# Altium PCB PCB_pami_superstar.PcbDoc
Units mm, origin at the board's own origin, x right, y up, seen from the top; angles counter-clockwise.
Board outline 83 x 54.25 mm, 2 copper layers (Top Layer, Bottom Layer); 28 components, 29 nets, 101 pads, 1 vias.
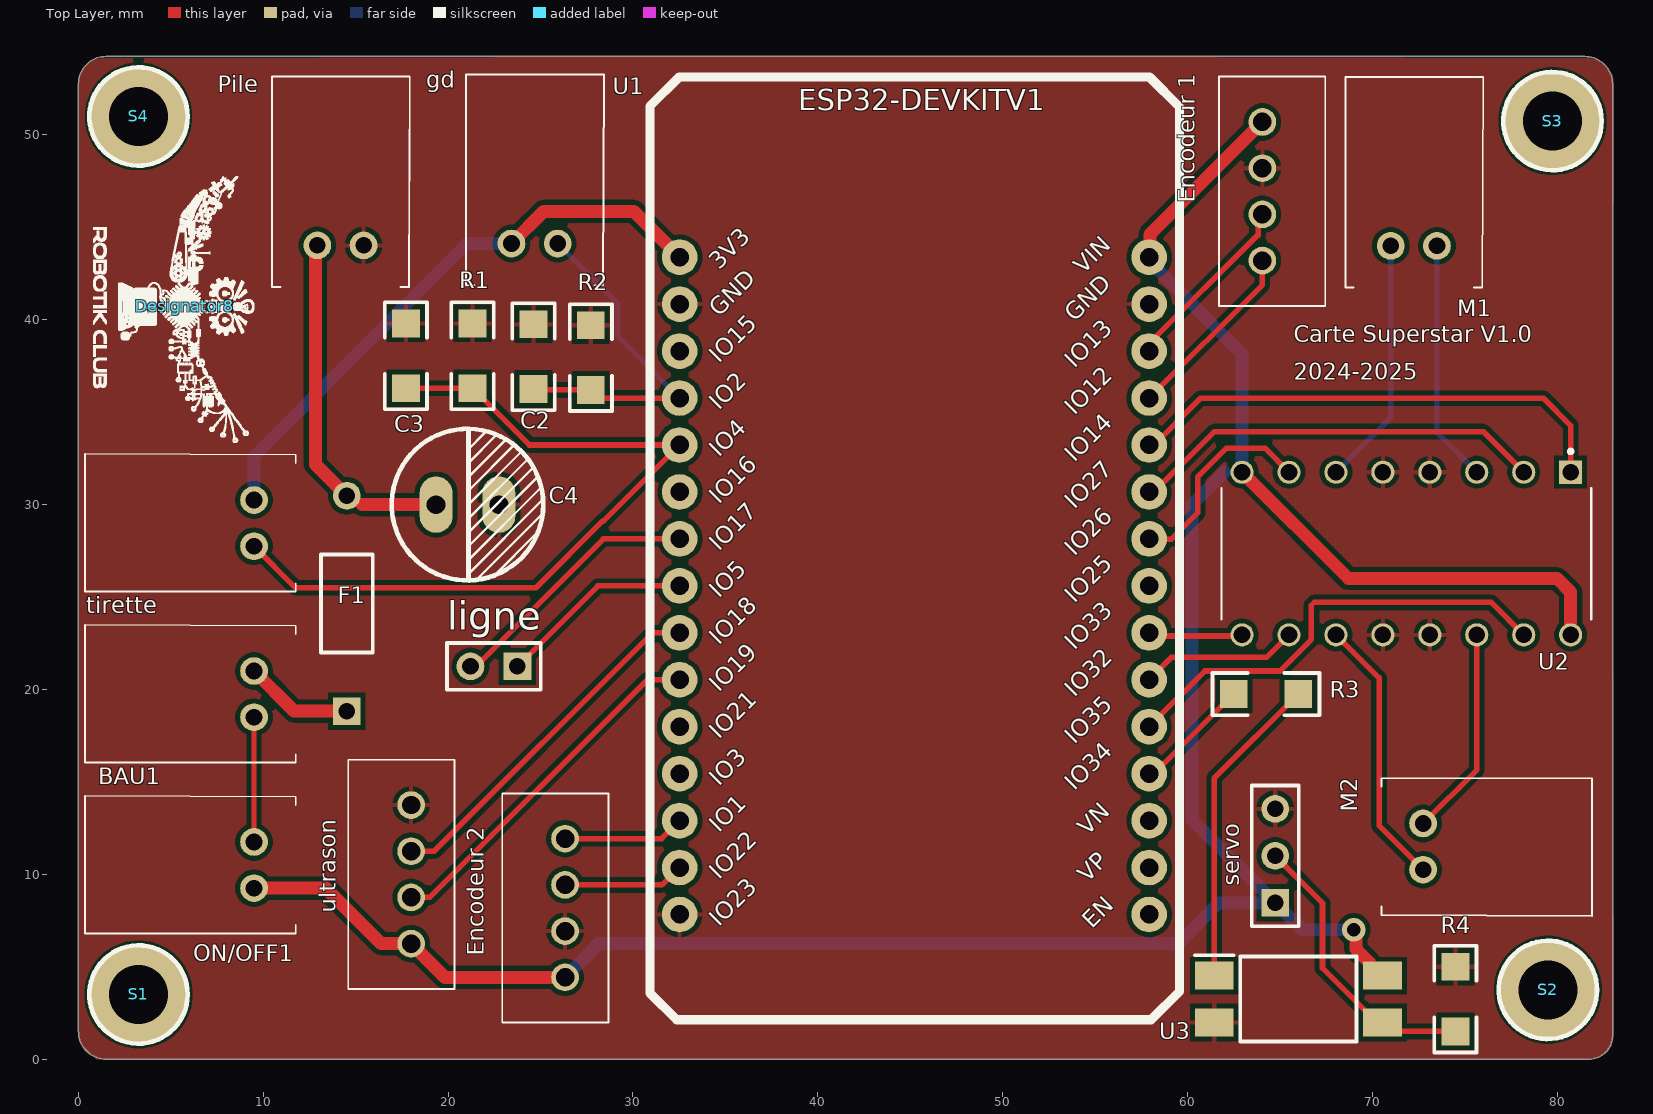
[diagram p0: Top Layer view]
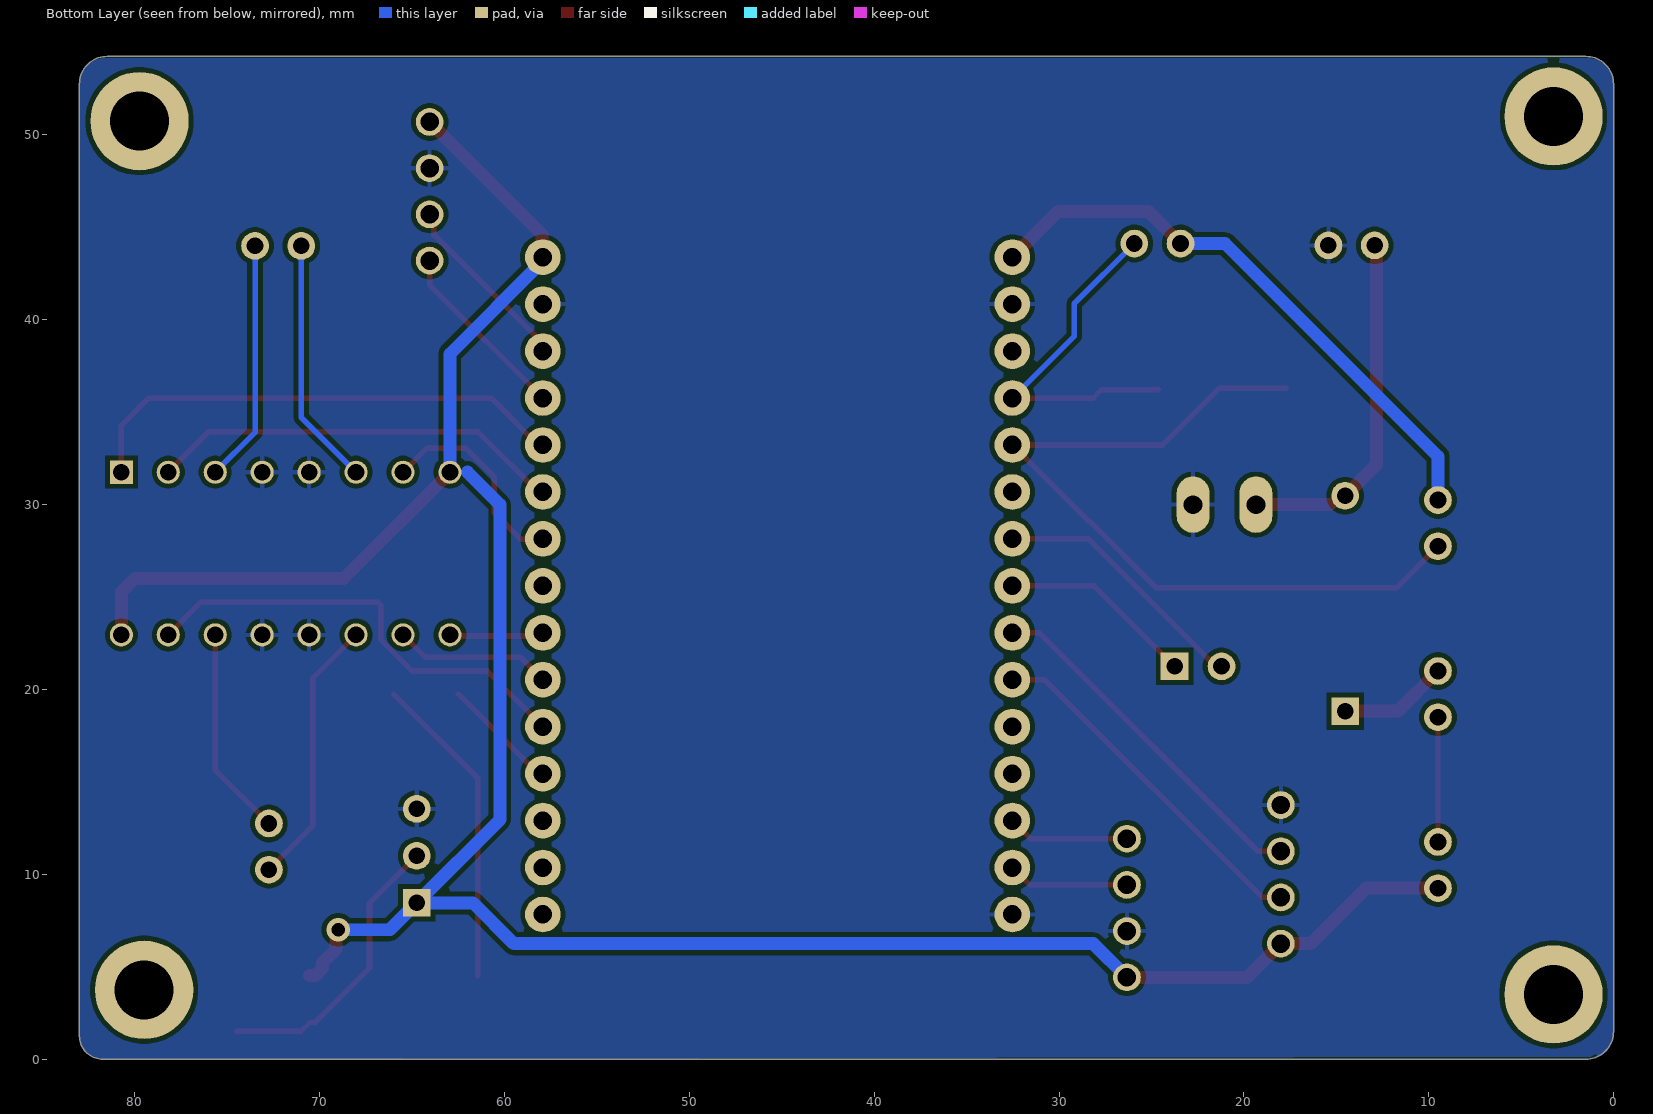
[diagram p1: Bottom Layer view, seen from below]
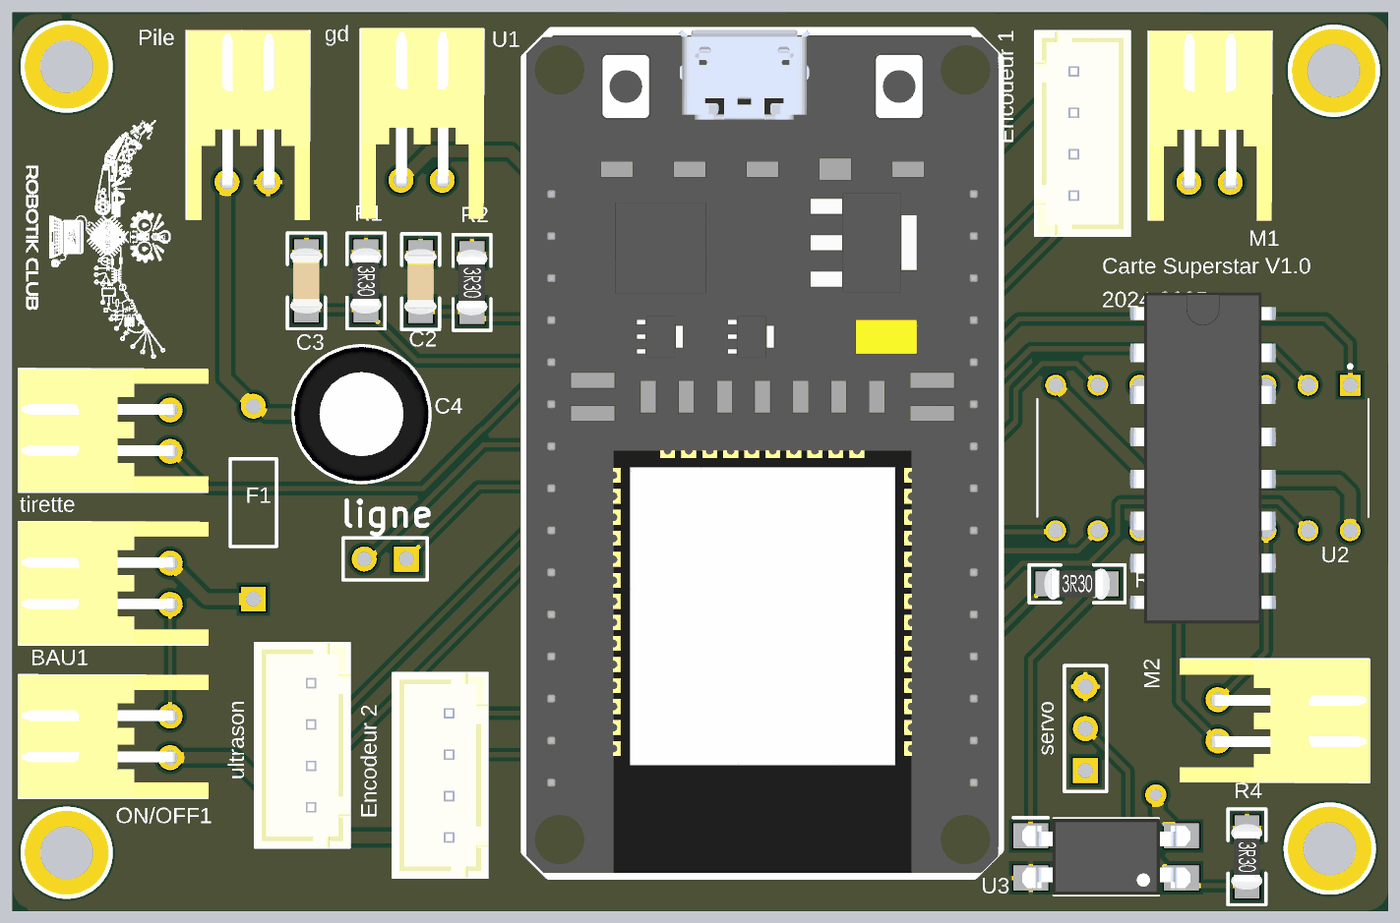
[diagram p2: 3D render of the assembled board from above, using the file's embedded part models]

## Layer stack, top to bottom
Top Solder: solder mask 0.0102, Solder Resist, Dk 3.5
Top Layer: signal copper 0.0356
Dielectric 1: dielectric 0.32, FR-4, Dk 4.8
Bottom Layer: signal copper 0.0356
Bottom Solder: solder mask 0.0102, Solder Resist, Dk 3.5

## Board outline
1.5,0 81.75,0 ccw(c81.75,1.25) 83,1.25 83,52.75 ccw(c81.5,52.75) 81.5,54.25 1.5,54.25 ccw(c1.5,52.75) 0,52.75 0,1.5 ccw(c1.5,1.5)

## Design rules (kind name [scope] priority, off if disabled: settings)
Clearance [All] p1: gap=0.254 ignorepadtopadclearanceinfootprint=FALSE
PolygonConnect [All] p1: connectstyle=Relief reliefconductorwidth=0.254 reliefentries=4 polygonreliefangle="90 Angle" airgapwidth=0.254
RoutingVias [All] p1: holewidth=0.711 width=1.27 viastyle="Through Hole" minholewidth=0.711 minwidth=1.27 maxholewidth=0.711 maxwidth=1.27
SolderMaskExpansion [All] p1: expansion=0.102 istentingtop=FALSE
SupplyNets "Schematic Supply Nets_2" [InNet('GND')] p1: voltage=0.000
SupplyNets "Schematic Supply Nets_1" [InNet('VCC')] p2: voltage=0.000
SupplyNets "Schematic Supply Nets" [InNet('3V')] p3: voltage=0.000
Width [All] p1: maxlimit=0.7 minlimit=0.254 preferedwidth=0.7 minimp=50.000000 maximp=50.000000 favimp=50.000000
30 further rules are at their usual default settings.

## Components (designator, comment, footprint, x,y, rotation, side; value= is the part's Value field where it differs from the comment)
BAU1 "" S2B-XH-A 9.5,18.5 r90 top
C2 "Cap" "Capacitor 1206" 24.62,38.004 r270 top value=1µF
C3 "Cap" "Capacitor 1206" 17.72,38.054 r270 top value=1µF
C4 "35V" Condensateur 19.35,30 r0 top value=100uF
Designator8 "Comment" Logo_lowres 5.75,40.75 r270 top
"Encodeur 1" "" B4BXHALFSN 64.054,50.704 r270 top
"Encodeur 2" "" B4BXHALFSN 26.327,4.427 r90 top
F1 "2A max" PIN-W2/E2.8 14.52,24.654 r90 top
gd "" S2B-XH-A 23.427,44.127 r0 top
ligne "Header 2" HDR1X2 23.75,21.25 r180 top
M1 "M1" S2B-XH-A 71,44 r0 top
M2 "M2" S2B-XH-A 72.75,12.75 r270 top
ON/OFF1 "" S2B-XH-A 9.5,9.25 r90 top
Pile "" S2B-XH-A 12.927,44.027 r0 top
R1 "Res2" "Resistor 1206" 21.32,38.054 r270 top value=10K
R2 "Res2" "Resistor 1206" 27.72,37.954 r270 top value=10K
R3 "Res2" "Resistor 1206" 64.25,19.75 r0 top value=150
R4 "Res2" "Resistor 1206" 74.5,3.25 r270 top value=10K
S1 "Screw M3" "Screw M3" 3.25,3.5 r0 top
S2 "Screw M3" "Screw M3" 79.5,3.75 r0 top
S3 "Screw M3" "Screw M3" 79.75,50.75 r0 top
S4 "Screw M3" "Screw M3" 3.25,51 r0 top
servo "Header 3" HDR1X3 64.75,8.46 r90 top
tirette "" S2B-XH-A 9.5,27.75 r90 top
U1 "ESP32-DEVKITC-32D" MODULE_ESP32-DEVKITV1 45.227,28.387 r0 top
U2 "L293D" DIP880W50P254L2000H510Q16 71.844,27.354 r270 top
U3 "FOD817S" SOP254P1016X385-4N 66,3.25 r0 top
ultrason "B4B-XH-A_LF__SN_" B4BXHALFSN 18,6.25 r90 top

## Footprints (in the part's own frame and the unit in brackets; to place one, negate y for a bottom-side part, rotate by r counter-clockwise, add the part's x,y. Pads: shape width x height; smd on the part's side, far side on the other; paste and mask are expansions set on the pad)
B4BXHALFSN [mm]
  round 1.5 hole 1: 1(0,0) 2(2.5,0) 3(5,0) 4(7.5,0)
  silkscreen extent -2.45,-2.35 9.95,3.4, body extent -2.45,-2.35 9.95,3.4, height 7.52
"Capacitor 1206" [mm]
  rect 1.5x1.5 smd: 1(-1.75,0) 2(1.75,0)
  silkscreen extent -2.89,-1.14 2.89,1.14, body extent -1.98,-0.99 1.98,0.96, height 1.3
Condensateur [mil]
  oval 70x120 hole 40: 1(0,0) 2(133.86,0)
  silkscreen extent -94,-161 228,161, body extent -93,-160 227,160, height 500
DIP880W50P254L2000H510Q16 [mm]
  rect 1.25x1.25 / inner round 1.25 / far side rect 1.25x1.25 hole 0.9: 1(-4.4,8.89)
  round 1.25 hole 0.9: 2(-4.4,6.35) 3(-4.4,3.81) 4(-4.4,1.27) 5(-4.4,-1.27) 6(-4.4,-3.81) 7(-4.4,-6.35) 8(-4.4,-8.89) 9(4.4,-8.89) 10(4.4,-6.35) 11(4.4,-3.81) 12(4.4,-1.27) 13(4.4,1.27) 14(4.4,3.81) 15(4.4,6.35) 16(4.4,8.89)
  silkscreen extent -5.62,-10 3.55,10, body extent -10,-4.62 10,4.62, height 5.1
HDR1X2 [mm] "Connector; Header; 2 Position"
  rect 1.5x1.5 hole 0.9: 1(0,0)
  round 1.5 hole 0.9: 2(2.54,0)
  silkscreen extent -1.27,-1.27 3.81,1.27
HDR1X3 [mm] "Connector; Header; 3 Position"
  rect 1.5x1.5 hole 0.9: 1(0,0)
  round 1.5 hole 0.9: 2(2.54,0) 3(5.08,0)
  silkscreen extent -1.27,-1.27 6.35,1.27
Logo_lowres [mm]
  silkscreen extent -7.01,-4.93 7.39,3.76
MODULE_ESP32-DEVKITV1 [mm]
  round 1.93 / inner round 1.524 / far side round 1.93 hole 1: 1(-12.7,15) 2(-12.7,12.46) 3(-12.7,9.92) 4(-12.7,7.38) 5(-12.7,4.84) 6(-12.7,2.3) 7(-12.7,-0.24) 8(-12.7,-2.78) 9(-12.7,-5.32) 10(-12.7,-7.86) 11(-12.7,-10.4) 12(-12.7,-12.94) 13(-12.7,-15.48) 14(-12.7,-18.02) 15(-12.7,-20.56) 16(12.7,-20.56) 17(12.7,-18.02) 18(12.7,-15.48) 19(12.7,-12.94) 20(12.7,-10.4) 21(12.7,-7.86) 22(12.7,-5.32) 23(12.7,-2.78) 24(12.7,-0.24) 25(12.7,2.3) 26(12.7,4.84) 27(12.7,7.38) 28(12.7,9.92) 29(12.7,12.46) 30(12.7,15)
  silkscreen extent -14.31,-26.26 14.35,24.75, body extent -14.22,-26.09 14.28,24.84, height 7.2
PIN-W2/E2.8 [mm] "Thru-Hole; 2 Leads"
  rect 1.5x1.5 hole 0.9: 1(-5.825,0)
  round 1.5 hole 0.9: 2(5.825,0)
  silkscreen extent -2.65,-1.4 2.65,1.4
"Resistor 1206" [mm]
  rect 1.5x1.5 smd: 1(-1.75,0) 2(1.75,0)
  silkscreen extent -2.89,-1.14 2.89,1.14, body extent -1.98,-0.95 1.98,0.93, height 0.55
S2B-XH-A [mm]
  round 1.5 hole 0.9: 1(0,0) 2(2.5,0)
  silkscreen extent -2.45,-2.26 5,9.14, body extent -2.41,-2.32 4.99,9.18, height 6.15
"Screw M3" [mm] "M3 iso Screw"
  round 5.32 hole 3.2 unplated: 0(0,0)
  silkscreen extent -2.66,-2.66 2.66,2.66
SOP254P1016X385-4N [mm]
  rect 2.1x1.5 smd: 1(-4.55,1.27) 2(-4.55,-1.27) 3(4.55,-1.27) 4(4.55,1.27)
  silkscreen extent -5.6,-2.3 3.15,2.37, body extent -5.08,-2.3 5.08,2.3, height 3.85

## Part data
BAU1 gd M1 M2 ON/OFF1 Pile tirette: library part "Header 2H", "Header, 2-Pin, Right Angle", LatestRevisionDate=17-Jul-2002, LatestRevisionNote="Re-released for DXP Platform.", Publisher="Altium Limited"
C2 C3: "Capacitor", LatestRevisionDate=17-Jul-2002, LatestRevisionNote="Re-released for DXP Platform.", PackageDescription="Radial Cap, Thru-Hole; 2 Leads; 0.3 in Pin Spacing", PackageReference=RAD-0.3, Published=8-Jun-2000, Publisher="Altium Limited"
C4: library part "Cap Pol1", "Polarized Capacitor (Radial)", LatestRevisionDate=17-Jul-2002, LatestRevisionNote="Re-released for DXP Platform.", PackageDescription="Polarized Capacitor (Radial); 2 Leads", PackageReference=RB7.6-15, Published=8-Jun-2000, Publisher="Altium Limited"
"Encodeur 1" "Encodeur 2": library part "Header 4H", "Header, 4-Pin, Right Angle", LatestRevisionDate=17-Jul-2002, LatestRevisionNote="Re-released for DXP Platform.", Publisher="Altium Limited"
F1: library part "Fuse 2", "Fuse", LatestRevisionDate=17-Jul-2002, LatestRevisionNote="Re-released for DXP Platform.", PackageDescription="Thru-Hole; 2 Leads", PackageReference=PIN-W2/E2.8, Published=8-Jun-2000, Publisher="Altium Limited"
ligne: "Header, 2-Pin", LatestRevisionDate=17-Jul-2002, LatestRevisionNote="Re-released for DXP Platform.", Publisher="Altium Limited"
R1 R2 R3 R4: "Resistor", LatestRevisionDate=17-Jul-2002, LatestRevisionNote="Re-released for DXP Platform.", PackageDescription="Axial Device, Thru-Hole; 2 Leads; 0.4 in Pin Spacing", PackageReference=AXIAL-0.4, Published=8-Jun-2000, Publisher="Altium Limited"
servo: "Header, 3-Pin", LatestRevisionDate=17-Jul-2002, LatestRevisionNote="Re-released for DXP Platform.", Publisher="Altium Limited"
U1: "Eval Board For Esp-Wroom-32", Package=None, Availability=Unavailable, MF="Espressif Systems", MP=ESP32-DEVKITC-32D, Price=None, SnapEDA_Link=https://www.snapeda.com/parts/ESP32-DEVKITC-32D/Espressif%20Systems/view-part/?ref=snap
U2: "Bipolar Motor Driver - Parallel 16-PowerDIP", Package="DIP-16 STMicroelectronics", Availability="In Stock", Check_prices=https://www.snapeda.com/parts/L293D/STMicroelectronics/view-part/?ref=eda, MF=STMicroelectronics, MP=L293D, Price=None, Purchase-URL=https://pricing.snapeda.com/search/part/L293D/?ref=eda, SnapEDA_Link=https://www.snapeda.com/parts/L293D/STMicroelectronics/view-part/?ref=snap
U3: library part Optoisolator1, "4-Pin Phototransistor Optocoupler", DatasheetVersion=Nov-2003, LatestRevisionDate=04-Mar-2005, LatestRevisionNote="Sch pins 3 & 4 Swapped.", PackageReference=DIP-4, Published=24-Mar-1999, Publisher="Altium Limited"
ultrason: "Connector", Arrow Part Number=B4B-XH-A(LF)(SN), Manufacturer_Name="JST (JAPAN SOLDERLESS TERMINALS)", Arrow Price/Stock=https://www.arrow.com/en/products/b4b-xh-a-lf-sn/jst-manufacturing?region=europe, Datasheet Link=https://datasheet.lcsc.com/szlcsc/JST-Sales-America-B4B-XH-A-LF-SN_C144395.pdf, Height=7mm, Manufacturer_Part_Number=B4B-XH-A(LF)(SN)

## Via types
v1: diameter 1.27, hole 0.711, Top Layer to Bottom Layer, 1 vias

## Nets (pads, with @x,y where several pads share a name; then routed paths per layer and width w, separated by ;. In a path a pad name is that pad's centre, name@x,y a point inside that pad or via, vN(x,y) a via of type N, cw(c..) or ccw(c..) an arc to the next point about the centre after c; other vN are vias at no path point)
3V: gd.1 tirette.2 U1.1 | length 32.2
  Top Layer w0.7: gd.1 25.17,45.87 30.044,45.87 U1.1
  Bottom Layer w0.254: U1.1@32.22,43.387 U1.1
  Bottom Layer w0.7: tirette.2 9.5,32.6 21.027,44.127 gd.1
ECHO: U1.9 ultrason.3 | length 19.4
  Top Layer w0.3: ultrason.3 19.25,11.25 31.067,23.067 U1.9
"enable 1": U1.26 U2.1 | length 27.1
  Top Layer w0.3: U1.26@57.954,32.994 60.714,35.754 79.254,35.754 80.744,34.264 U2.1@80.744,31.754
"enable 2": U1.22 U2.9 | length 5.1
  Top Layer w0.254: U1.22@57.954,22.834 U1.22@58.014,22.894 ; U2.9@62.904,22.894 U2.9@62.964,22.954
  Top Layer w0.3: U1.22@58.014,22.894 U2.9@62.904,22.894
ESP_PWM: R3.1 U1.19 | length 6.4
  Top Layer w0.254: U1.19 U1.19@58.197,15.447
  Top Layer w0.3: U1.19@58.197,15.447 R3.1
GND: "Encodeur 1.2" "Encodeur 2.2" C2.1 C3.1 C4.2 Pile.2 R1.1 R2.1 R4.1 servo.3 U1.2 U1.15 U1.29 U2.4 U2.5 U2.12 U2.13 U3.2 ultrason.4
J1: ligne.1 U1.8 | length 10.6
  Top Layer w0.3: ligne.1 28.107,25.607 U1.8
J2: ligne.2 U1.7 | length 14.2
  Top Layer w0.254: ligne.2 ligne.2@21.5,21.25
  Top Layer w0.3: ligne.2@21.5,21.25 28.397,28.147 U1.7
NetBAU1_1: BAU1.1 ON/OFF1.2 | length 6.8
  Top Layer w0.254: ON/OFF1.2 BAU1.1
NetBAU1_2: BAU1.2 F1.1 | length 5.9
  Top Layer w0.7: BAU1.2 11.671,18.829 F1.1
NetC4_1: C4.1 F1.2 Pile.1 | length 19.3
  Top Layer w0.254: Pile.1@12.819,43.919 Pile.1 ; F1.2 14.858,30.479 15.337,30
  Top Layer w0.7: Pile.1@12.819,43.919 12.819,32.18 F1.2 ; 15.337,30 C4.1
"NetEncodeur 1_3": "Encodeur 1.3" U1.28 | length 10.3
  Top Layer w0.254: U1.28 U1.28@57.927,38.677 ; 63.824,45.474 64.054,45.704
  Top Layer w0.3: U1.28 57.927,38.709 63.792,44.574 63.824,44.574 63.824,45.474
"NetEncodeur 1_4": "Encodeur 1.4" U1.27 | length 10
  Top Layer w0.3: U1.27 64.054,41.894 64.054,43.204
"NetEncodeur 2_3": "Encodeur 2.3" U1.14 | length 6.6
  Top Layer w0.254: U1.14@32.504,10.367 U1.14
  Top Layer w0.3: 26.327,9.427 31.564,9.427 U1.14@32.504,10.367
"NetEncodeur 2_4": "Encodeur 2.4" U1.13 | length 6.6
  Top Layer w0.3: 26.327,11.927 31.547,11.927 U1.13
NetM1_1: M1.1 U2.6 | length 13.5
  Bottom Layer w0.3: U2.6 71,34.72 M1.1
NetM1_2: M1.2 U2.3 | length 13.1
  Bottom Layer w0.3: M1.2 73.5,33.909 U2.3
NetM2_1: M2.1 U2.14 | length 11.4
  Top Layer w0.3: M2.1 75.654,15.654 U2.14
NetM2_2: M2.2 U2.11 | length 14.7
  Top Layer w0.3: U2.11 70.368,20.62 70.368,12.632 M2.2
NetR3_2: R3.2 U3.1 | length 17.1
  Top Layer w0.3: U3.1 61.45,15.2 R3.2
OPT_PWM: R4.2 servo.2 U3.3 | length 15.7
  Top Layer w0.254: U3.3@70.25,1.98 U3.3 U3.3@71.03,1.5
  Top Layer w0.3: servo.2 67.308,8.442 67.308,4.922 U3.3@70.25,1.98 ; U3.3@71.03,1.5 R4.2
"Sens1 M1": U1.25 U2.2 | length 22.6
  Top Layer w0.3: U1.25@57.954,30.454 61.454,33.954 76.004,33.954 U2.2@78.204,31.754
"Sens1 M2": U1.21 U2.10 | length 8.6
  Top Layer w0.3: U1.21 59.15,21.75 64.3,21.75 U2.10@65.504,22.954
"Sens2 M1": U1.24 U2.7 | length 11.4
  Top Layer w0.254: U1.24@57.954,27.914 U1.24@58.172,28.132
  Top Layer w0.3: U1.24@58.172,28.132 59.132,28.132 60.554,29.554 60.554,31.502 62.107,33.054 64.204,33.054 U2.7@65.504,31.754
"Sens2 M2": U1.20 U2.15 | length 24.9
  Top Layer w0.254: 66.707,24.559 66.856,24.707
  Top Layer w0.3: U1.20 60.94,21 65,21 66.707,22.707 66.707,24.559 ; 66.856,24.707 76.441,24.707 U2.15
switch_gd: C2.2 gd.2 R2.2 U1.4 | length 19.2
  Top Layer w0.254: C2.2 C2.2@24.67,36.204 ; R2.2 R2.2@28.157,35.767
  Top Layer w0.3: C2.2@24.67,36.204 R2.2 ; R2.2@28.157,35.767 U1.4
  Bottom Layer w0.3: gd.2 29.186,40.869 29.186,39.109 U1.4
tirette: C3.2 R1.2 tirette.1 U1.5 | length 43.2
  Top Layer w0.254: 28.331,29.09 28.39,29.09
  Top Layer w0.3: tirette.1 11.75,25.5 24.742,25.5 28.331,29.09 ; C3.2 R1.2 24.397,33.227 U1.5 28.39,29.09
TRIG: U1.10 ultrason.2 | length 19.4
  Top Layer w0.3: ultrason.2 19,8.75 30.777,20.527 U1.10
VCC: "Encodeur 1.1" "Encodeur 2.1" ON/OFF1.1 servo.1 U1.30 U2.8 U2.16 U3.4 ultrason.1 | length 140.2
  Top Layer w0.3: U1.30 U1.30@57.977,43.437
  Top Layer w0.7: ON/OFF1.1 13.385,9.25 16.385,6.25 ultrason.1 19.823,4.427 26.327,4.427 ; U1.30@57.977,43.437 57.977,44.627 64.054,50.704 ; U2.8 68.709,26 80,26 80.734,25.266 U2.16 ; v1(69,7) 69.109,6.891 69.109,5.961 69.85,5.22 69.85,4.92 70.25,4.52 U3.4
  Bottom Layer w0.254: 62.004,31.754 U2.8
  Bottom Layer w0.7: 26.327,4.427 28.15,6.25 59.5,6.25 61.71,8.46 servo.1 ; U1.30@57.954,43.154 62.954,38.154 U2.8 ; 62.004,31.754 60.25,30 60.25,12.96 servo.1 ; v1@69.211,7 66.21,7 servo.1
pads on no net: S1.0 S2.0 S3.0 S4.0 U1.3 U1.6 U1.11 U1.12 U1.16 U1.17 U1.18 U1.23

## Polygon pours and split planes (outlines as drawn)
GND on Top Layer "GND_TOP" (solid, pour order 0): 0.593,0.255 cw(c1.397,1.397) 0,1.397 0,52.757 cw(c1.397,52.757) 1.397,54.155 41.527,54.25 81.657,54.155 cw(c81.657,52.757) 83.055,52.757 83,27.051 83.055,1.404 cw(c81.657,1.397) 81.657,0 1,0 cw(c1.155,0.336) 0.796,0.242 cw(c0.708,0.464)
GND on Bottom Layer "GND_BOTTOM" (solid, pour order 1): 1.073,0.127 cw(c1.107,0.221) 1.012,0.255 cw(c0.808,0.458) 0.605,0.255 cw(c1.409,1.397) 0.012,1.397 0.012,52.757 cw(c1.409,52.757) 1.409,54.155 81.669,54.155 cw(c81.602,52.735) 83.022,52.668 83.012,26.979 83.002,1.333 cw(c81.672,1.33) 81.669,0

## Silkscreen, mask and mechanical layers (free items; w line width, h text height)
Top Overlay:
  text "Carte Superstar V1.0" at 65.75,38.5 h1.52
  text "2024-2025" at 65.75,36.468 h1.52
Mechanical 1:
  lines w0.254: 0,1.397 ccw(c1.449,1.449) 1.5,0 81.5,0 ccw(c81.552,1.449) 83.001,1.397 83.001,52.704 ccw(c81.542,52.819) 81.657,54.277 1.397,54.277 ccw(c1.39,52.888) 0,52.895 0,1.397

## Text inside footprints (layer, text, board x,y; h text height)
U1: Top Overlay "ESP32-DEVKITV1" at 38.937,50.957 h1.97; Top Overlay "3V3" at 34.897,42.447 h1.57 r45; Top Overlay "GND" at 34.897,39.907 h1.57 r45; Top Overlay "IO15" at 34.897,37.367 h1.57 r45; Top Overlay "IO2" at 34.897,34.827 h1.57 r45; Top Overlay "IO4" at 34.897,32.287 h1.57 r45; Top Overlay "IO16" at 34.897,29.747 h1.57 r45; Top Overlay "IO17" at 34.897,27.207 h1.57 r45; Top Overlay "IO5" at 34.897,24.667 h1.57 r45; Top Overlay "IO18" at 34.897,22.127 h1.57 r45; Top Overlay "IO19" at 34.897,19.587 h1.57 r45; Top Overlay "IO21" at 34.897,17.047 h1.57 r45; Top Overlay "IO3" at 34.897,14.507 h1.57 r45; Top Overlay "IO1" at 34.897,11.967 h1.57 r45; Top Overlay "IO22" at 34.897,9.427 h1.57 r45; Top Overlay "IO23" at 34.897,6.887 h1.57 r45; Top Overlay "VIN" at 54.597,42.187 h1.57 r45; Top Overlay "GND" at 54.107,39.637 h1.57 r45; Top Overlay "IO13" at 54.107,37.097 h1.57 r45; Top Overlay "IO12" at 54.107,34.557 h1.57 r45; Top Overlay "IO14" at 54.107,32.017 h1.57 r45; Top Overlay "IO27" at 54.107,29.477 h1.57 r45; Top Overlay "IO26" at 54.107,26.937 h1.57 r45; Top Overlay "IO25" at 54.107,24.397 h1.57 r45; Top Overlay "IO33" at 54.107,21.857 h1.57 r45; Top Overlay "IO32" at 54.107,19.317 h1.57 r45; Top Overlay "IO35" at 54.107,16.777 h1.57 r45; Top Overlay "IO34" at 54.107,14.237 h1.57 r45; Top Overlay "VN" at 54.827,11.807 h1.57 r45; Top Overlay "VP" at 54.827,9.267 h1.57 r45; Top Overlay "EN" at 55.077,6.797 h1.57 r45